# Altium PCB PCB1.PcbDoc (part 2 of 2)
Units mm, origin at the board's own origin, x right, y up, seen from the top; angles counter-clockwise.
Board outline 91 x 53 mm, 2 copper layers (Top Layer, Bottom Layer); 68 components, 95 nets, 342 pads, 353 vias.
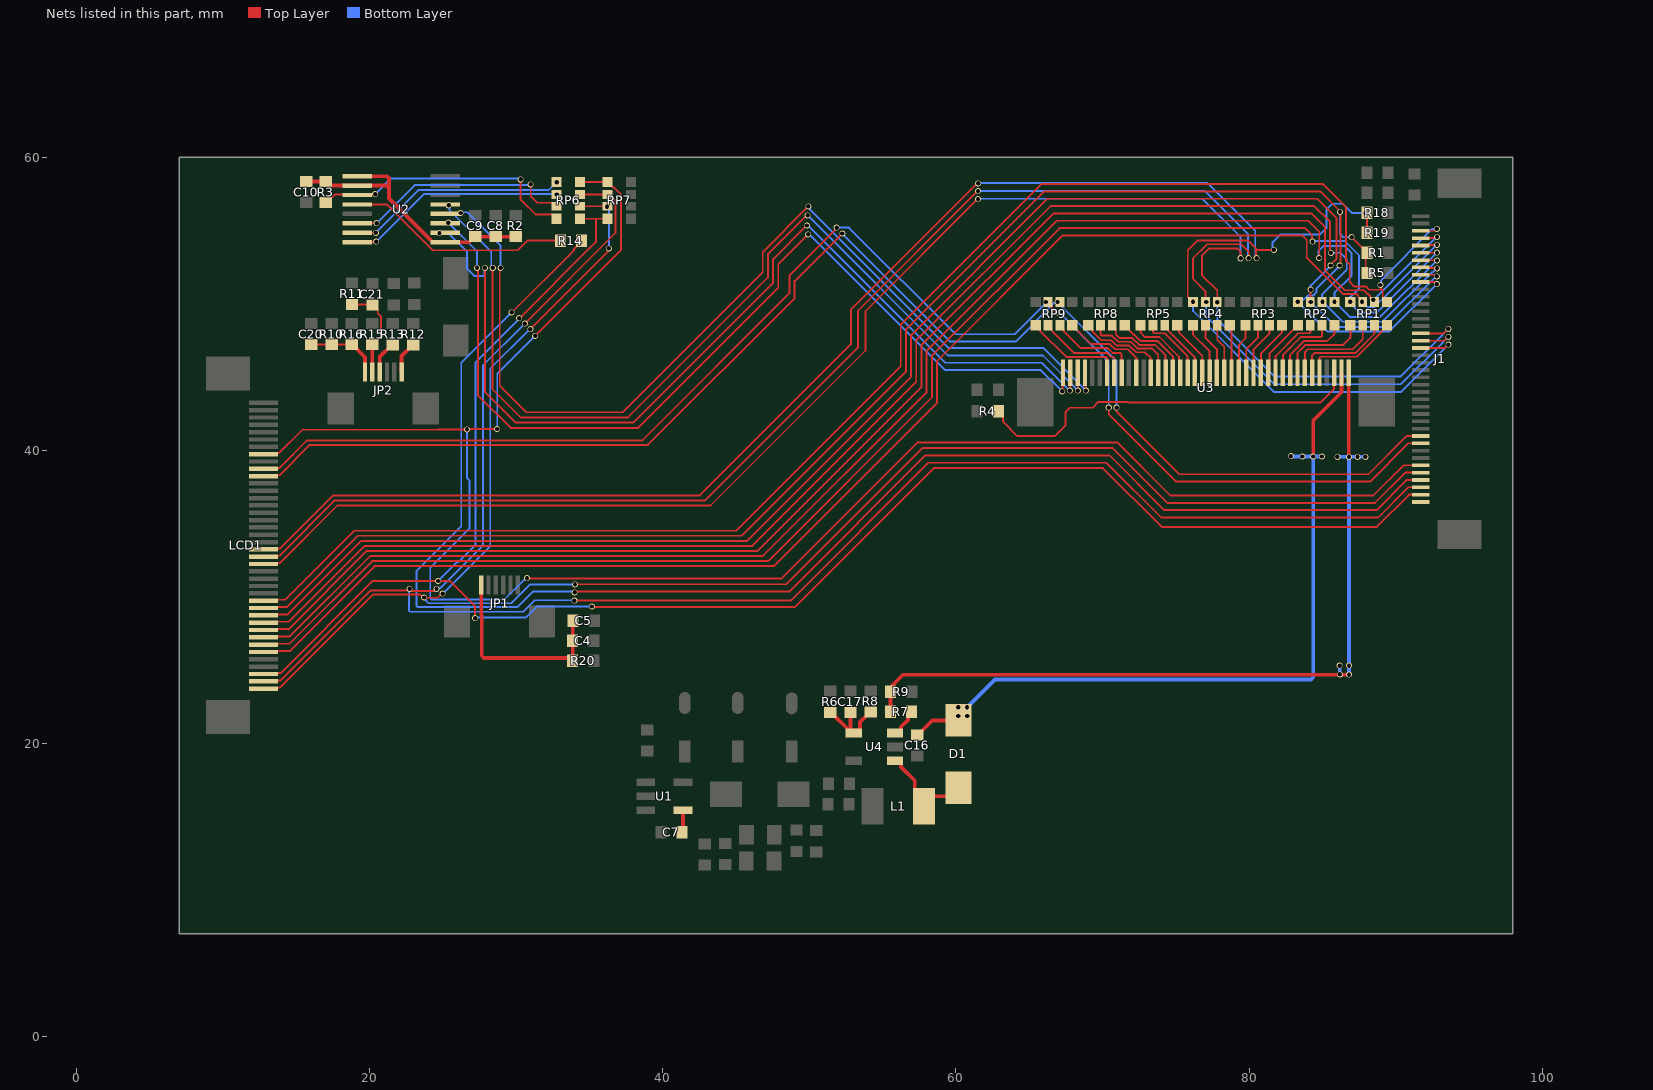
[diagram p2: the nets of this part, all layers, seen from the top]

## Via types
v1: diameter 0.41, hole 0.3, Top Layer to Bottom Layer, tented both sides, 353 vias

## Nets (pads, with @x,y where several pads share a name; then routed paths per layer and width w, separated by ;. In a path a pad name is that pad's centre, name@x,y a point inside that pad or via, vN(x,y) a via of type N, cw(c..) or ccw(c..) an arc to the next point about the centre after c; other vN are vias at no path point) (continued)
LCD_G5: J1.17 LCD1.23 RP4.2 | length 110
  Top Layer w0.127: LCD1.23@12.751,32.236 12.814,32.3 13.859,32.3 17.791,36.231 43.255,36.231 53.829,46.806 53.829,49.498 61.468,57.137 v1(61.505,57.137) ; RP4.2@77.826,50.123 77.826,50.901 76.784,51.943 76.784,53.264 77.292,53.772 79.2,53.772 79.427,53.545 v1(79.427,53.1) ; J1.17@91.719,47.975 93.271,47.975 93.577,48.281 v1(93.599,48.281)
  Bottom Layer w0.127: v1(61.505,57.137) 61.529,57.162 76.807,57.162 79.419,54.549 79.419,53.108 v1(79.427,53.1) ; v1(77.826,50.089) 77.826,48.928 81.712,45.041 90.36,45.041 93.203,47.885 93.203,47.907 93.577,48.281 v1(93.599,48.281)
LCD_G6: J1.18 LCD1.22 RP4.3 | length 112.8
  Top Layer w0.127: LCD1.22@12.751,32.736 12.815,32.8 13.852,32.8 17.628,36.576 42.892,36.576 53.329,47.013 53.329,49.535 61.468,57.674 v1(61.504,57.674) ; RP4.3@77.026,50.123 77.026,50.863 76.175,51.714 76.175,53.086 77.14,54.051 79.477,54.051 79.975,53.553 v1(79.975,53.111) ; J1.18@91.719,47.475 93.308,47.475 93.577,47.744 v1(93.599,47.744)
  Bottom Layer w0.127: v1(61.504,57.674) 61.529,57.699 76.977,57.699 79.919,54.757 79.919,53.167 v1(79.975,53.111) ; v1(77.068,50.118) 77.068,49.148 81.712,44.504 90.36,44.504 93.203,47.348 93.203,47.37 93.577,47.744 v1(93.599,47.744)
LCD_G7: J1.19 LCD1.21 R18.1 R19.1 RP4.4 | length 127.5
  Top Layer w0.127: LCD1.21@12.751,33.236 12.814,33.3 13.894,33.3 17.515,36.921 42.53,36.921 52.829,47.22 52.829,49.572 61.468,58.211 v1(61.519,58.211) ; v1(76.176,50.123) 75.819,50.48 75.819,53.645 76.479,54.305 79.934,54.305 80.478,53.761 80.478,53.145 v1(80.512,53.111) ; 80.493,53.721 80.543,53.67 v1(81.686,53.67) ; v1(87.945,56.18) 88.021,56.18 R18.1@88.036,56.195 R19.1@88.036,54.828 ; J1.19@91.719,46.975 93.367,46.975 v1(93.599,47.207)
  Bottom Layer w0.127: v1(61.519,58.211) 61.544,58.236 77.147,58.236 80.419,54.964 80.419,53.204 v1(80.512,53.111) ; v1(76.176,50.123) 76.176,49.503 81.712,43.967 90.36,43.967 v1(93.599,47.207) ; v1(81.686,53.67) 81.685,53.67 81.61,53.745 81.61,54.204 82.118,54.712 84.836,54.712 85.293,55.169 85.293,56.439 85.674,56.82 86.411,56.82 87.051,56.18 v1(87.945,56.18)
LCD_HS: J1.31 LCD1.11 RP9.2 | length 98.7
  Top Layer w0.127: LCD1.11@12.751,38.236 12.808,38.294 13.859,38.294 15.926,40.361 38.989,40.361 48.997,50.368 48.997,51.537 v1(52.248,54.788) ; v1(70.964,42.901) 70.964,42.629 75.231,38.362 88.15,38.362 90.763,40.975 J1.31@91.719,40.975
  Bottom Layer w0.127: v1(52.248,54.788) 59.623,47.412 64.069,47.412 66.717,50.06 66.875,50.06 v1(66.929,50.114) 70.964,46.079 v1(70.964,42.901)
LCD_R0: J1.3 LCD1.28 RP1.1 | length 103.8
  Top Layer w0.127: LCD1.28@12.751,29.736 12.814,29.8 14.255,29.8 18.963,34.508 45.023,34.508 56.236,45.72 56.236,48.565 65.832,58.161 85.067,58.161 86.603,56.624 86.603,52.944 86.868,52.68 86.868,51.486 87.182,51.171 87.995,51.171 88.214,50.952 89.078,50.952 ; v1@88.875,51.333 89.013,51.195 89.013,51.017 89.078,50.952 ; RP1.1@89.41,50.123 89.124,50.409 89.124,50.907 89.078,50.952 ; J1.3@91.719,54.975 92.682,54.975 v1(92.812,55.105)
  Bottom Layer w0.127: v1(88.959,51.274) 89.013,51.328 89.013,51.599 92.512,55.098 92.805,55.098 v1(92.812,55.105)
LCD_R1: J1.4 LCD1.32 RP1.2 | length 100.8
  Top Layer w0.127: LCD1.32@12.751,27.736 12.814,27.8 14.465,27.8 19.794,33.129 46.473,33.129 57.65,44.306 57.65,47.151 66.66,56.161 84.238,56.161 85.184,55.215 85.184,52.774 85.177,52.767 85.177,52.266 86.526,50.917 87.816,50.917 88.07,50.663 88.139,50.663 88.251,50.552 88.251,50.482 88.56,50.173 RP1.2@88.56,50.123 ; J1.4@91.719,54.475 92.665,54.475 92.746,54.556 v1(92.823,54.556)
  Bottom Layer w0.127: v1(88.477,50.256) 88.5,50.256 92.8,54.556 v1(92.823,54.556)
LCD_R2: J1.5 LCD1.35 RP1.3 | length 99.2
  Top Layer w0.127: LCD1.35@12.751,26.236 12.814,26.3 14.539,26.3 20.335,32.095 47.56,32.095 58.71,43.245 58.71,46.09 67.281,54.661 83.617,54.661 83.932,54.345 83.932,53.126 86.395,50.663 87.339,50.663 87.451,50.552 87.451,50.482 RP1.3@87.75,50.183 ; J1.5@91.719,53.975 91.742,53.997 92.801,53.997 v1(92.823,54.019)
  Bottom Layer w0.127: v1(87.706,50.14) 88.068,49.777 88.558,49.777 89.535,50.754 92.8,54.019 v1(92.823,54.019)
LCD_R3: J1.6 LCD1.34 RP1.4 | length 101.8
  Top Layer w0.127: LCD1.34@12.751,26.736 12.814,26.8 14.531,26.8 20.171,32.439 47.198,32.439 58.357,43.599 58.357,46.443 67.074,55.161 83.824,55.161 84.297,54.688 84.297,54.26 v1(84.328,54.229) ; J1.6@91.719,53.475 91.723,53.479 92.819,53.479 v1(92.823,53.482)
  Bottom Layer w0.127: v1(84.328,54.229) 84.379,54.28 86.512,54.28 87.503,53.289 87.503,51.054 86.893,50.444 86.893,50.063 87.012,49.944 87.012,49.919 87.528,49.403 88.721,49.403 89.075,49.757 92.8,53.482 v1(92.823,53.482)
  other v1: 86.91,50.123
LCD_R4: J1.7 LCD1.33 RP2.1 | length 104.6
  Top Layer w0.127: LCD1.33@12.751,27.236 12.814,27.3 14.549,27.3 20.033,32.784 46.835,32.784 58.003,43.952 58.003,46.797 66.867,55.661 84.031,55.661 84.789,54.903 v1(84.789,53.115) ; J1.7@91.719,52.975 91.734,52.96 92.808,52.96 v1(92.823,52.945)
  Bottom Layer w0.127: v1(84.789,53.115) 84.734,53.169 84.734,53.592 85.09,53.948 86.485,53.948 86.995,53.438 86.995,51.918 85.827,50.749 85.827,50.128 v1(85.832,50.123) 86.857,49.098 88.953,49.098 92.8,52.945 v1(92.823,52.945)
LCD_R5: J1.8 LCD1.31 RP2.2 | length 104.7
  Top Layer w0.127: LCD1.31@12.751,28.236 12.814,28.3 14.482,28.3 19.656,33.474 46.11,33.474 57.296,44.659 57.296,47.504 66.453,56.661 84.445,56.661 85.527,55.579 85.527,53.527 v1(85.58,53.475) ; J1.8@91.719,52.475 91.753,52.442 92.789,52.442 v1(92.823,52.408)
  Bottom Layer w0.127: v1(85.58,53.475) 86.225,53.475 86.665,53.035 86.665,52.324 84.988,50.648 84.988,50.241 85.014,50.216 v1(85.014,50.14) 86.385,48.768 89.103,48.768 92.459,52.123 92.504,52.123 92.789,52.408 v1(92.823,52.408)
LCD_R6: J1.9 LCD1.30 RP2.3 | length 105.6
  Top Layer w0.127: LCD1.30@12.751,28.736 12.814,28.8 14.398,28.8 19.416,33.818 45.748,33.818 56.943,45.013 56.943,47.858 66.246,57.161 84.652,57.161 85.975,55.838 85.975,53.078 85.573,52.675 v1(85.573,52.603) ; RP2.3@84.182,50.123 84.201,50.142 v1(84.201,50.952) ; J1.9@91.719,51.975 92.631,51.975 92.735,51.871 v1(92.811,51.871)
  Bottom Layer w0.127: v1(84.201,50.114) 85.903,48.412 89.306,48.412 92.765,51.871 v1(92.811,51.871) ; v1(84.201,50.952) 84.201,51.232 v1(85.573,52.603)
LCD_R7: J1.10 LCD1.29 R1.1 R5.1 RP2.4 | length 113.3
  Top Layer w0.127: LCD1.29@12.751,29.236 12.814,29.3 14.339,29.3 19.202,34.163 45.386,34.163 56.589,45.366 56.589,48.211 66.039,57.661 84.859,57.661 v1@86.229,56.291 ; v1(86.182,52.603) 86.229,52.65 v1@86.229,56.261 ; v1(86.999,54.534) 87.015,54.534 88.036,53.512 R1.1@88.036,53.462 ; R1.1@87.96,53.462 87.96,52.172 R5.1@88.036,52.095 ; J1.10@91.719,51.475 92.682,51.475 92.812,51.345 v1(92.812,51.334)
  Bottom Layer w0.127: v1(86.182,52.603) 84.597,51.018 84.597,50.789 84.365,50.557 84.009,50.557 83.606,50.154 83.363,50.154 v1(83.332,50.123) 85.347,48.108 89.574,48.108 92.801,51.334 v1(92.812,51.334) ; v1(86.208,56.261) 86.208,54.762 86.436,54.534 v1(86.999,54.534)
LCD_VS: J1.32 LCD1.10 RP9.3 | length 98.9
  Top Layer w0.127: LCD1.10@12.751,38.736 12.812,38.798 13.855,38.798 15.723,40.665 38.608,40.665 48.643,50.7 48.643,51.92 51.867,55.143 v1(51.867,55.194) ; v1(66.142,50.114) RP9.3@66.231,50.114 ; RP9.3@66.25,50.114 RP9.3@66.231,50.114 ; v1(66.98,49.403) 66.926,49.457 66.728,49.457 66.585,49.6 66.583,49.6 66.509,49.675 66.509,49.836 RP9.3@66.231,50.114 ; v1(70.427,42.901) 70.427,42.459 75.024,37.862 88.256,37.862 90.869,40.475 J1.32@91.719,40.475
  Bottom Layer w0.127: v1(51.867,55.194) 52.7,55.194 59.982,47.912 64.012,47.912 66.142,50.042 v1(66.142,50.114) ; v1(66.98,49.403) 67.048,49.403 68.293,48.158 70.427,46.024 v1(70.427,42.901)
LED+: C16.2 D1.2 U3.2 | length 52.3
  Top Layer w0.254: C16.2@57.328,20.574 57.389,20.574 58.38,21.565 D1.2@59.944,21.565 ; D1.2@60.173,21.579 60.757,22.163 v1(60.757,22.454) ; v1(84.379,39.573) 84.379,42.037 86.305,43.963 U3.2@86.305,45.259
  Bottom Layer w0.254: v1(60.757,22.454) 62.662,24.359 84.23,24.359 84.379,24.507 v1(84.379,39.573) ; v1(82.853,39.6) 82.88,39.573 v1(83.642,39.573) v1(84.379,39.573) ; v1(84.963,39.573) v1(84.379,39.573)
  other v1: 60.147,21.869 60.782,21.869 60.147,22.479
LED-: R7.1 R9.1 U3.1 | length 56
  Top Layer w0.254: R7.1@55.522,22.174 55.535,22.187 55.535,23.429 R9.1@55.601,23.495 ; R9.1@55.601,23.901 56.388,24.689 v1@86.233,24.689 ; v1(86.19,24.717) 86.205,24.717 v1@86.233,24.689 ; U3.1@86.805,45.282 86.811,45.275 86.811,39.554 v1(86.817,39.548) ; v1(86.817,24.689) v1@86.233,24.689
  Bottom Layer w0.254: v1(86.03,39.548) v1(86.817,39.548) ; v1(86.182,25.298) 86.19,25.29 v1(86.19,24.717) ; v1(86.817,24.689) v1(86.817,25.298) v1(86.817,39.548) ; v1(87.935,39.548) v1(87.401,39.548) v1(86.817,39.548)
NetC4_2: C4.2 C5.2 JP1.6 R20.2 | length 14
  Top Layer w0.254: JP1.6@27.609,30.818 27.609,28.781 27.65,28.74 27.65,25.981 27.799,25.832 33.641,25.832 R20.2@33.844,25.629 33.863,25.647 33.863,27 33.863,28.353 C5.2@33.881,28.372
NetC7_2: C7.2 U1.4 | length 1.5
  Top Layer w0.127: C7.2@41.351,13.919 C7.2@41.377,13.945
  Top Layer w0.254: C7.2@41.377,13.945 U1.4@41.377,15.443
NetC8_2: C8.2 C9.2 C10.2 R2.1 R3.1 U2.1 U2.9 U2.10 | length 19.5
  Top Layer w0.254: C10.2@15.662,58.34 15.664,58.338 R3.1@17.008,58.338 17.289,58.057 U2.10@19.162,58.057 21.129,58.057 21.326,57.86 ; U2.9@19.162,58.7 21.177,58.7 21.326,58.551 21.326,57.86 ; R2.1@29.962,54.577 C9.2@27.219,54.577 27.169,54.577 26.791,54.199 U2.1@25.162,54.199 24.312,54.199 24.103,54.407 24.087,54.407 21.326,57.168 21.326,57.86
NetC17_2: C17.2 R6.1 R8.1 U4.4 | length 5.4
  Top Layer w0.254: R6.1@51.435,22.11 51.485,22.11 52.69,20.904 U4.4@52.807,20.904 ; C17.2@52.807,22.11 U4.4@52.807,20.904 ; U4.4@52.883,20.879 53.45,20.879 53.455,20.884 53.455,21.451 53.88,21.876 53.88,21.887 54.128,22.135 R8.1@54.178,22.135 ; U4.4@52.959,20.904 U4.4@52.807,20.904
NetC20_2: C20.2 JP2.6 R10.1 R16.2 | length 5
  Top Layer w0.127: C20.2@16.002,47.205 18.768,47.205 R16.2@18.771,47.207
  Top Layer w0.254: R16.2@18.771,47.207 18.821,47.207 19.68,46.348 JP2.6@19.68,45.347
NetC21_2: C21.2 JP2.5 R11.1 R15.2 | length 6.5
  Top Layer w0.127: R11.1@18.796,49.948 20.168,49.948 C21.2@20.193,49.923 20.243,49.923 20.555,49.611 20.555,49.34 20.783,49.111 20.783,47.772 20.218,47.207 R15.2@20.168,47.207
  Top Layer w0.254: R15.2@20.168,47.207 20.18,47.195 JP2.5@20.18,45.347
NetD1_1: D1.1 L1.2 U4.1 | length 7.1
  Top Layer w0.254: U4.1@55.832,18.811 56.082,18.811 56.255,18.638 56.255,18.388 57.185,17.459 57.185,16.145 L1.2@57.607,15.723 ; L1.2@57.808,15.723 57.808,15.774 58.431,16.397 59.425,16.397 D1.1@60.274,17.247
NetJP2_1: JP2.1 R12.2 | length 2.2
  Top Layer w0.254: JP2.1@22.18,45.347 22.18,46.436 22.937,47.193 R12.2@22.987,47.193
NetJP2_4: JP2.4 R13.2 | length 2.2
  Top Layer w0.254: JP2.4@20.68,45.347 20.68,46.358 21.515,47.193 R13.2@21.565,47.193
NetR4_1: R4.1 U3.3 | length 26.8
  Top Layer w0.127: R4.1@62.904,42.672 63.216,42.36 63.216,41.942 64.188,40.97 66.751,40.97 67.488,41.707 67.488,42.621 67.767,42.901 69.331,42.901 69.726,43.296 71.735,43.296 71.764,43.267 84.876,43.267 85.805,44.196 U3.3@85.805,45.282
NetR7_2: R7.2 U4.3 | length 2
  Top Layer w0.254: U4.3@55.832,20.711 56.082,20.711 56.255,20.884 56.255,21.134 56.724,21.603 56.724,22.104 R7.2@56.794,22.174
NetRP1_5: RP1.5 U3.8 | length 6.3
  Top Layer w0.127: U3.8@83.305,45.282 83.305,46.653 83.693,47.041 83.845,47.193 86.436,47.193 86.91,47.667 RP1.5@86.91,48.523
NetRP1_6: RP1.6 U3.7 | length 6.7
  Top Layer w0.127: U3.7@83.805,45.282 83.805,46.687 84.006,46.888 87.071,46.888 87.76,47.577 RP1.6@87.76,48.523
NetRP1_7: RP1.7 U3.6 | length 6.6
  Top Layer w0.127: U3.6@84.305,45.282 84.305,46.484 84.455,46.634 87.232,46.634 88.56,47.962 RP1.7@88.56,48.523
NetRP1_8: RP1.8 U3.5 | length 6.6
  Top Layer w0.127: U3.5@84.805,45.282 84.805,46.306 84.879,46.38 87.337,46.38 89.051,48.094 89.051,48.163 RP1.8@89.41,48.523
NetRP2_5: RP2.5 U3.12 | length 4.1
  Top Layer w0.127: U3.12@81.305,45.282 81.392,45.368 81.392,46.6 81.466,46.674 81.483,46.674 RP2.5@83.332,48.523
NetRP2_6: RP2.6 U3.11 | length 4.7
  Top Layer w0.127: U3.11@81.805,45.282 81.805,46.423 83.364,47.982 84.108,47.982 84.182,48.057 RP2.6@84.182,48.523
NetRP2_7: RP2.7 U3.10 | length 5.1
  Top Layer w0.127: U3.10@82.305,45.282 82.305,46.491 83.542,47.728 84.908,47.728 84.982,47.803 RP2.7@84.982,48.523
NetRP2_8: RP2.8 U3.9 | length 5.4
  Top Layer w0.127: U3.9@82.805,45.282 82.805,46.517 83.582,47.295 83.588,47.295 83.74,47.447 85.319,47.447 85.832,47.961 RP2.8@85.832,48.523
NetRP3_5: RP3.5 U3.16 | length 3.4
  Top Layer w0.127: U3.16@79.305,45.282 79.305,47.176 79.754,47.625 RP3.5@79.754,48.523
NetRP3_6: RP3.6 U3.15 | length 3.6
  Top Layer w0.127: U3.15@79.805,45.282 79.805,46.887 80.604,47.686 RP3.6@80.604,48.523
NetRP3_7: RP3.7 U3.14 | length 3.7
  Top Layer w0.127: U3.14@80.305,45.282 80.305,46.882 81.404,47.981 RP3.7@81.404,48.523
NetRP3_8: RP3.8 U3.13 | length 3.8
  Top Layer w0.127: U3.13@80.805,45.282 80.805,46.596 82.254,48.045 RP3.8@82.254,48.523
NetRP4_5: RP4.5 U3.20 | length 3.7
  Top Layer w0.127: RP4.5@76.176,48.523 76.176,47.885 77.305,46.756 U3.20@77.305,45.282
NetRP4_6: RP4.6 U3.19 | length 3.6
  Top Layer w0.127: RP4.6@77.026,48.523 77.026,47.685 77.805,46.906 U3.19@77.805,45.282
NetRP4_7: RP4.7 U3.18 | length 3.4
  Top Layer w0.127: RP4.7@77.826,48.523 77.826,47.535 78.305,47.056 U3.18@78.305,45.282
NetRP4_8: RP4.8 U3.17 | length 3.3
  Top Layer w0.127: RP4.8@78.676,48.523 78.805,48.394 U3.17@78.805,45.282
NetRP5_5: RP5.5 U3.24 | length 4.9
  Top Layer w0.127: RP5.5@72.598,48.523 72.598,48.027 72.898,47.727 73.889,47.727 75.219,46.397 75.219,45.368 U3.24@75.305,45.282
NetRP5_6: RP5.6 U3.23 | length 4.6
  Top Layer w0.127: RP5.6@73.448,48.523 73.448,48.055 73.522,47.981 74.244,47.981 75.805,46.42 U3.23@75.805,45.282
NetRP5_7: RP5.7 U3.22 | length 4.1
  Top Layer w0.127: RP5.7@74.248,48.523 74.484,48.286 74.484,48.167 76.305,46.346 U3.22@76.305,45.282
NetRP5_8: RP5.8 U3.21 | length 3.9
  Top Layer w0.127: RP5.8@75.098,48.523 75.21,48.411 75.21,48.057 76.805,46.461 U3.21@76.805,45.282
NetRP8_5: RP8.5 U3.28 | length 6.3
  Top Layer w0.127: RP8.5@69.02,48.523 69.306,48.236 69.306,48.107 69.911,47.502 70.612,47.502 70.969,47.145 71.83,47.145 72.289,46.685 72.898,46.685 73.286,46.298 73.286,45.301 U3.28@73.305,45.282
NetRP8_6: RP8.6 U3.27 | length 6.4
  Top Layer w0.127: RP8.6@69.87,48.523 69.87,47.903 69.944,47.828 70.645,47.828 71.074,47.399 71.935,47.399 72.395,46.939 73.381,46.939 73.805,46.515 U3.27@73.805,45.282
NetRP8_7: RP8.7 U3.26 | length 5.9
  Top Layer w0.127: RP8.7@70.67,48.523 70.906,48.286 70.906,47.926 71.18,47.653 72.04,47.653 72.5,47.193 73.584,47.193 74.305,46.472 U3.26@74.305,45.282
NetRP8_8: RP8.8 U3.25 | length 5.3
  Top Layer w0.127: RP8.8@71.52,48.523 72.146,47.896 72.156,47.896 72.605,47.447 73.762,47.447 74.805,46.404 U3.25@74.805,45.282
NetRP9_5: RP9.5 U3.34 | length 6.8
  Top Layer w0.127: RP9.5@65.442,48.523 65.728,48.236 65.728,48.167 67.523,46.372 70.231,46.372 70.305,46.298 U3.34@70.305,45.282
NetRP9_6: RP9.6 U3.33 | length 6.5
  Top Layer w0.127: RP9.6@66.292,48.523 66.528,48.286 66.528,48.167 68.069,46.626 70.336,46.626 70.579,46.383 70.731,46.383 70.805,46.308 U3.33@70.805,45.282
NetRP9_7: RP9.7 U3.32 | length 6.4
  Top Layer w0.127: RP9.7@67.092,48.523 67.328,48.286 67.328,48.167 68.53,46.965 70.357,46.965 70.684,46.637 71.22,46.637 71.305,46.552 U3.32@71.305,45.282
NetRP9_8: RP9.8 U3.30 | length 5.6
  Top Layer w0.127: RP9.8@67.942,48.523 69.216,47.248 70.506,47.248 70.864,46.891 71.725,46.891 72.314,46.302 U3.30@72.314,45.949
RESET: J1.40
RT_CLK: RP6.2 U2.16 | length 15
  Top Layer w0.127: U2.16@19.162,54.199 19.176,54.214 20.432,54.214 v1(20.447,54.229)
  Bottom Layer w0.127: v1(20.447,54.229) 23.711,57.493 32.709,57.493 v1(32.753,57.448)
RT_CS: RP6.1 U2.15 | length 15
  Top Layer w0.127: U2.15@19.162,54.842 19.163,54.84 20.42,54.84 v1(20.422,54.839)
  Bottom Layer w0.127: v1(20.422,54.839) 23.33,57.747 32.202,57.747 v1(32.753,58.298)
RT_MISO: R14.2 U2.12 | length 15.4
  Top Layer w0.127: U2.12@19.162,56.771 21.17,56.771 24.296,53.645 30.1,53.645 30.76,54.305 R14.2@33.006,54.305
RT_MOSI: RP6.3 U2.14 | length 15.8
  Top Layer w0.127: U2.14@19.162,55.485 19.168,55.492 20.465,55.492 v1(20.472,55.499) ; v1(30.988,58.142) 30.988,57.328 31.431,56.885 32.517,56.885 RP6.3@32.753,56.648
  Bottom Layer w0.127: v1(20.472,55.499) 23.062,58.088 30.934,58.088 v1(30.988,58.142)
RT_PEN: R3.2 RP6.4 U2.11 | length 18.4
  Top Layer w0.127: R3.2@17.008,56.888 17.058,56.888 17.618,57.448 19.128,57.448 U2.11@19.162,57.414 19.195,57.447 20.338,57.447 v1(20.371,57.48) ; v1(30.302,58.484) 30.302,57.099 31.316,56.085 32.467,56.085 RP6.4@32.753,55.798
  Bottom Layer w0.127: v1(20.371,57.48) 21.438,58.547 30.075,58.547 30.084,58.538 30.248,58.538 v1(30.302,58.484)
TOUCH_INT: J1.39 LCD1.38 RP6.5 RP7.4 | length 121
  Top Layer w0.127: LCD1.38@12.751,24.736 12.814,24.8 13.928,24.8 20.21,31.081 v1(24.67,31.081) ; v1@24.79,31.039 24.79,31.071 24.8,31.081 25.468,31.081 27.191,29.358 v1(27.191,28.548) ; v1(30.204,49.019) 30.239,49.019 35.022,53.801 35.452,54.232 35.452,55.798 ; RP6.5@34.353,55.798 35.452,55.798 ; v1(35.154,29.337) 35.179,29.312 49.022,29.312 58.496,38.786 70.028,38.786 74.041,34.773 88.722,34.773 90.925,36.975 J1.39@91.719,36.975 ; RP7.4@36.233,55.798 35.452,55.798
  Bottom Layer w0.127: v1(24.67,31.081) 25.954,32.365 26.037,32.365 27.229,33.557 27.229,45.991 30.205,48.967 v1@30.205,49.018 ; v1(27.191,28.548) 27.231,28.588 30.645,28.588 31.394,29.337 v1(35.154,29.337)
TOUCH_MISO: J1.37 R14.1 | length 104.9
  Top Layer w0.127: v1(29.693,49.403) 29.712,49.403 33.953,53.643 33.953,53.752 34.456,54.255 R14.1@34.456,54.305 ; v1(33.983,30.31) 34.026,30.353 48.62,30.353 57.918,39.652 70.478,39.652 74.216,35.913 88.699,35.913 90.761,37.975 J1.37@91.719,37.975
  Bottom Layer w0.127: v1(29.693,49.403) 26.249,45.959 26.249,34.809 23.19,31.75 23.19,29.384 23.265,29.31 30.1,29.31 31.143,30.353 33.94,30.353 v1(33.983,30.31)
TOUCH_RST: J1.35 LCD1.8 RP6.8 RP7.1 | length 126.5
  Top Layer w0.127: LCD1.8@12.751,39.736 12.833,39.818 13.834,39.818 15.418,41.402 24.651,41.402 24.677,41.427 v1(26.645,41.427) 26.657,41.44 28.689,41.44 v1(28.702,41.453) ; v1(30.734,31.278) 30.77,31.242 48.094,31.242 57.391,40.538 71.005,40.538 74.631,36.913 88.488,36.913 90.55,38.975 J1.35@91.719,38.975 ; v1(31.293,47.803) 37.16,53.67 37.16,57.441 36.662,57.939 36.593,57.939 RP7.1@36.233,58.298 RP6.8@34.353,58.298
  Bottom Layer w0.127: v1(26.645,41.427) 26.645,38.1 26.822,37.922 26.822,34.671 24.13,31.979 24.13,29.892 24.204,29.818 29.194,29.818 30.541,31.166 30.545,31.166 30.657,31.278 v1(30.734,31.278) ; v1(28.702,41.453) 28.702,45.212 v1(31.293,47.803)
TOUCH_SCL: J1.38 LCD1.39 RP6.7 RP7.2 | length 126
  Top Layer w0.127: LCD1.39@12.751,24.236 12.814,24.3 13.936,24.3 20.074,30.437 22.548,30.437 22.602,30.491 22.66,30.491 22.733,30.418 v1(22.733,30.545) ; v1@22.778,30.409 24.419,30.409 24.56,30.55 v1(24.563,30.55) ; v1(30.584,48.639) 36.774,54.829 36.774,57.027 36.662,57.139 36.593,57.139 36.283,57.448 RP7.2@36.233,57.448 RP6.7@34.353,57.448 ; v1(33.96,29.743) 48.717,29.743 58.125,39.152 70.271,39.152 74.009,35.413 88.804,35.413 90.866,37.475 J1.38@91.719,37.475
  Bottom Layer w0.127: v1(22.733,30.545) 22.682,30.495 22.682,29.056 22.757,28.981 30.479,28.981 31.259,29.762 33.942,29.762 v1(33.96,29.743) ; v1(24.563,30.55) 24.613,30.6 24.831,30.6 27.729,33.498 27.729,45.784 v1(30.584,48.639)
TOUCH_SDA: J1.36 LCD1.40 RP6.6 RP7.3 | length 123.1
  Top Layer w0.127: LCD1.40@12.751,23.736 12.814,23.8 13.868,23.8 20.218,30.15 23.457,30.15 23.652,29.955 v1(23.724,29.955) 23.742,29.936 24.628,29.936 24.905,30.213 v1(24.981,30.213) ; v1(30.963,48.259) 36.268,53.564 36.268,53.718 v1(36.322,53.772) ; v1(34.011,30.846) 34.025,30.861 48.421,30.861 57.711,40.152 70.685,40.152 74.424,36.413 88.593,36.413 90.655,38.475 J1.36@91.719,38.475 ; RP6.6@34.353,56.648 RP7.3@36.195,56.648
  Bottom Layer w0.127: v1(23.724,29.955) 23.724,29.878 23.876,29.726 23.876,29.713 24.025,29.564 29.647,29.564 30.919,30.836 34,30.836 v1(34.011,30.846) ; v1(24.981,30.213) 28.229,33.461 28.229,45.577 30.912,48.26 v1(30.963,48.259) ; v1(36.195,56.617) 36.322,56.49 v1(36.322,53.772)
X+: U2.2 U3.39 | length 67.1
  Top Layer w0.127: v1(27.861,52.451) 27.88,52.433 27.88,43.973 29.97,41.883 37.975,41.883 47.526,51.433 47.526,53.038 v1(49.827,55.338) ; v1(67.778,44.071) 67.791,44.085 67.791,45.268 U3.39@67.805,45.282
  Bottom Layer w0.127: v1(24.765,54.813) 25.375,54.813 26.645,53.543 26.645,52.375 27.127,51.892 27.764,51.892 27.838,51.967 27.838,52.428 v1(27.861,52.451) ; v1(49.827,55.338) 49.886,55.338 59.258,45.966 65.861,45.966 67.756,44.071 v1(67.778,44.071)
X-: U2.4 U3.37 | length 67.1
  Top Layer w0.127: v1(28.935,52.451) 28.88,52.396 28.88,44.387 30.677,42.59 37.268,42.59 46.819,52.141 46.819,53.524 v1(49.936,56.642) ; U3.37@68.805,45.282 68.833,45.254 68.833,44.099 v1(68.861,44.071)
  Bottom Layer w0.127: v1(26.213,56.185) 26.264,56.236 26.645,56.236 28.935,53.945 v1(28.935,52.451) ; v1(49.936,56.642) 49.936,56.565 50.038,56.464 50.038,56.438 59.51,46.966 65.988,46.966 68.861,44.093 v1(68.861,44.071)
Y+: U2.3 U3.40 | length 65.5
  Top Layer w0.127: v1(27.324,52.451) 27.38,52.396 27.38,43.766 29.616,41.529 38.329,41.529 47.879,51.08 47.879,52.705 v1(49.911,54.737) ; v1(67.241,44.018) 67.273,44.05 67.273,45.25 U3.40@67.305,45.282
  Bottom Layer w0.127: v1(25.375,55.524) 27.324,53.575 v1(27.324,52.451) ; v1(49.911,54.737) 49.987,54.737 59.258,45.466 65.802,45.466 67.241,44.027 v1(67.241,44.018)
Y-: U2.5 U3.38 | length 67.4
  Top Layer w0.127: v1(28.398,52.451) 28.38,52.433 28.38,44.18 30.324,42.236 37.621,42.236 47.172,51.787 47.172,53.37 49.834,56.032 v1(49.885,56.032) ; U3.38@68.305,45.282 68.314,45.272 68.314,44.08 v1(68.324,44.071)
  Bottom Layer w0.127: v1(25.392,56.716) 25.446,56.662 25.446,56.393 28.296,53.543 28.296,52.63 28.398,52.528 v1(28.398,52.451) ; v1(49.885,56.032) 59.451,46.466 65.942,46.466 68.324,44.084 v1(68.324,44.071)
pads on no net: LCD1.0 U2.13 U3.35

## Polygon pours and split planes (outlines as drawn)
GND on Top Layer "GND_L01_P027" (solid, remove dead copper, pour order 27): 7.01,59.995 97.993,59.995 97.993,7.01 97.968,6.985 6.985,6.985
+3.3_EXT on Top Layer "+3.3_EXT_L01_P019" (solid, remove dead copper, pour order 19): 18.491,27.305 18.466,27.28 17.424,27.28 16.916,26.772 16.916,22.987 32.995,22.987 33.02,22.962 33.02,7.01 46.457,7.01 46.482,6.985 46.507,7.01 46.507,12.573 38.481,12.573 37.77,13.284 37.77,24.562 37.109,25.222 24.003,25.222 23.216,26.01 18.491,26.01
LED- on Top Layer "LED-_L01_P026" (solid, remove dead copper, pour order 26): 85.776,38.938 87.782,38.938 88.341,39.497 88.341,40.843 88.265,40.843 87.452,41.656 87.452,46.025 87.274,46.203 86.665,46.203 86.665,43.637 85.75,42.723
LED+ on Top Layer "LED+_L01_P025" (solid, remove dead copper, pour order 25): 86.157,46.177 86.157,44.272 82.067,40.183 82.067,39.141 82.22,38.989 85.496,38.989 85.674,39.167 85.674,42.723 86.487,43.536 86.462,43.561 86.462,46.177
LED- on Top Layer "LED-_L01_P023" (solid, remove dead copper, pour order 23): 55.042,25.959 56.794,27.711 87.401,27.711 87.833,27.28 87.833,23.647 55.169,23.647 55.042,23.774
+5 on Top Layer "+5_L01_P020" (solid, remove dead copper, pour order 20): 92.1,55.347 93.878,55.347 94.005,55.474 94.005,56.337 93.955,56.388 92.126,56.388 92.075,56.337
+3.3_EXT on Top Layer "+3.3_EXT_L01_P016" (solid, remove dead copper, pour order 16): 11.709,40.894 11.557,41.046 10.744,41.046 10.668,40.97 10.668,40.107 10.77,40.005 11.709,40.005 11.811,40.107 11.811,40.894
+5 on Top Layer "+5_L01_P015" (solid, remove dead copper, pour order 15): 11.76,43.383 11.709,43.434 10.617,43.434 10.617,42.52 10.668,42.469 11.633,42.469 11.836,42.672 11.836,43.383
LED- on Top Layer "LED-_L01_P013" (solid, remove dead copper, pour order 13): 55.067,24.028 55.042,24.003 55.042,21.692 55.88,21.692 55.931,21.641 56.032,21.742 56.032,24.054
NetR7_2 on Top Layer "NETR7_2_L01_P012" (solid, remove dead copper, pour order 12): 56.591,22.581 56.591,22.301 55.27,20.98 55.27,20.447 56.337,20.447 56.363,20.422 57.353,21.412 57.353,22.581 57.328,22.606
NetC17_2 on Top Layer "NETC17_2_L01_P011" (solid, remove dead copper, pour order 11): 50.927,22.581 50.952,22.606 54.686,22.606 54.686,21.742 53.569,20.625 53.569,20.447 52.502,20.447 51.232,21.717 51.003,21.717
GND on Top Layer "GND_L01_P010" (solid, remove dead copper, pour order 10): 48.666,13.614 48.717,13.665 51.054,13.665 51.791,14.402 51.791,16.307 50.927,16.307 50.8,16.18 50.851,16.129 50.851,15.367 49.555,15.367 48.641,14.453
L3.3V on Top Layer "L3.3V_L01_P009" (solid, remove dead copper, pour order 9): 47.015,14.529 46.99,14.503 46.99,11.278 48.108,11.278 48.133,11.303 50.749,11.303 51.029,11.582 51.029,13.005 50.775,13.259 48.616,13.259 48.184,13.691 48.184,14.503
+3.3_EXT on Top Layer "+3.3_EXT_L01_P008" (solid, remove dead copper, pour order 8): 42.342,11.227 42.367,11.252 46.253,11.252 46.253,12.624 46.228,12.649 46.203,12.624 42.748,12.624 42.342,12.217
+3.3_board on Top Layer "+3.3_BOARD_L01_P007" (solid, remove dead copper, pour order 7): 40.665,17.704 40.64,17.678 40.64,16.916 43.739,13.818 44.755,13.818 44.755,13.564 45.212,13.106 46.253,13.106 46.253,14.427 46.228,14.453 46.203,14.427 45.212,14.427 45.212,14.503 42.037,17.678
+5 on Top Layer "+5_L01_P006" (solid, remove dead copper, pour order 6): 38.43,19.914 38.125,19.609 38.125,17.069 39.421,17.069 41.021,18.669 41.046,18.644 41.986,18.644 41.986,20.244 41.961,20.269 38.405,20.269
GND on Top Layer "GND_L01_P004" (solid, remove dead copper, pour order 4): 55.169,19.38 55.194,19.406 56.439,19.406 56.439,19.177 56.921,18.694 57.861,18.694 57.861,19.482 57.201,20.142 55.169,20.142
NetD1_1 on Top Layer "NETD1_1_L01_P002" (solid, remove dead copper, pour order 2): 55.194,19.152 55.194,16.84 56.21,15.824 60.935,15.824 60.935,18.11 60.376,18.669 56.718,18.669 56.718,18.847 56.388,19.177
+5 on Top Layer "+5_L01_P000" (solid, remove dead copper, pour order 0): 40.996,18.644 41.021,18.669 45.542,18.669 45.542,18.618 46.99,17.17 46.99,15.646 47.168,15.469 50.419,15.469 50.546,15.596 50.546,17.932 50.724,18.11 52.045,18.11 52.197,17.958 52.197,15.291 52.502,14.986 55.22,14.986 55.372,15.138 55.347,15.164 55.347,18.237 53.315,20.269 41.072,20.269 40.996,20.193
LED+ on Top Layer "LED+_L01_P003" (solid, remove dead copper, pour order 3): 56.921,20.193 56.921,21.006 57.252,21.006 59.03,22.784 60.909,22.784 60.909,20.422 60.935,20.396 58.877,20.396 58.674,20.193
GND on Top Layer "GND_L01_P001" (solid, remove dead copper, pour order 1): 50.825,17.78 50.851,17.755 50.851,15.367 51.689,15.367 51.714,15.342 51.765,15.392 51.765,17.805
GND on Bottom Layer "GND_L02_P028" (solid, remove dead copper, pour order 28): 7.01,59.995 97.993,59.995 97.993,7.01 97.968,6.985 6.985,6.985
+5 on Bottom Layer "+5_L02_P021" (solid, remove dead copper, pour order 21): 92.888,56.388 97.993,56.388 97.993,7.01 97.968,7.036 32.995,7.036 32.995,20.422 33.172,20.599 40.005,20.599 40.005,12.548 41.605,10.947 88.824,10.947 89.967,12.09 89.967,37.338 94.183,41.554 94.183,54.127 92.913,55.397
LED- on Bottom Layer "LED-_L02_P024" (solid, remove dead copper, pour order 24): 85.623,23.647 89.941,23.647 89.941,39.853 89.865,39.929 85.623,39.929
LED+ on Bottom Layer "LED+_L02_P022" (solid, remove dead copper, pour order 22): 59.665,21.514 63.627,21.514 64.135,22.022 64.135,23.622 85.623,23.622 85.623,39.929 82.601,39.929 82.067,39.395 82.067,28.372 80.391,26.695 60.173,26.695 59.588,26.111
+3.3_EXT on Bottom Layer "+3.3_EXT_L02_P018" (solid, remove dead copper, pour order 18): 10.744,41.046 10.668,40.97 10.668,28.067 12.776,25.959 18.517,25.959 18.517,27.965 18.491,27.991 13.691,27.991 12.624,29.058 12.624,41.046
+5 on Bottom Layer "+5_L02_P017" (solid, remove dead copper, pour order 17): 11.709,43.434 7.493,43.434 7.01,42.951 7.01,22.987 27.559,22.987 33.02,17.526 39.98,17.526 39.98,22.772 39.987,22.78 36.783,25.984 12.802,25.984 10.643,28.143 10.643,41.529 11.709,42.596

## Other copper
Top Layer:
  pour cut-out: 86.385,54.508 86.385,51.816 87.097,51.105 88.798,51.105 88.798,51.283 89.052,51.537 89.052,53.721
  pour cut-out: 73.381,44.526 73.431,44.475 73.431,43.739 84.531,43.739 84.938,44.145 84.912,44.171 84.912,44.526
  pour cut-out: 27.254,53.67 27.254,52.324 27.711,51.867 27.711,49.225 30.302,49.225 30.353,49.174 33.503,52.324 33.503,54.458 33.274,54.686 32.918,54.331 30.658,54.331 29.997,53.67
  pour cut-out: 65.075,49.809 65.126,49.759 65.126,48.59 89.662,48.59 89.789,48.717 89.764,48.743 89.764,49.987
  pour cut-out: 87.808,59.995 86.385,58.522 57.404,58.522 56.439,59.487 56.439,59.995
Bottom Layer:
  pour cut-out: 68.351,49.098 70.866,46.584 71.628,46.584 72.161,47.117 68.885,50.394 68.174,50.394
  pour cut-out: 61.443,54.966 61.417,54.966 61.062,54.61 62.459,53.213 75.184,53.213 76.962,54.991
  pour cut-out: 18.771,48.641 18.809,48.679 23.529,48.679 27.483,44.726 27.483,39.853 27.991,39.853 29.007,38.837 33.02,42.85 33.02,49.555 30.963,51.613 31.674,52.324 31.674,53.467 34.442,56.236 32.944,57.734 23.47,57.734 20.32,54.585 20.32,52.832 18.847,51.359

## Silkscreen, mask and mechanical layers (free items; w line width, h text height)
Top Overlay:
  drawing of 112 lines, arcs and shapes, not listed
  text "VCC" at 84.912,58.496 h0.64
  text "IM2" at 82.067,57.988 h0.76
  text "ALIENTEK LCD CONFIG" at 64.973,57.328 h0.76
  text "GND" at 84.887,57.302 h0.64
  text "IM0" at 72.111,55.982 h0.76
  text "IM1" at 75.146,55.982 h0.76
  text "IM2" at 77.927,55.982 h0.76
  text "VCC" at 84.887,55.855 h0.64
  text "IM1" at 82.271,55.474 h0.76
  text "0" at 72.695,54.661 h0.76
  text "0" at 75.654,54.661 h0.76
  text "0" at 78.613,54.661 h0.76
  text "GND" at 84.861,54.661 h0.64
  text "4.3 480*272" at 63.424,54.635 h0.76
  text "4.3 800*480" at 63.475,53.467 h0.76
  text "0" at 72.695,53.365 h0.76
  text "0" at 75.654,53.365 h0.76
  text "1" at 78.765,53.365 h0.76
  text "VCC" at 84.912,53.137 h0.64
  text "IM0" at 82.144,52.807 h0.76
  text "GND" at 84.887,51.943 h0.64
  text "4.3 RGB LCD" at 44.12,48.463 h1.52
  text "for FANKE" at 25.171,42.443 h0.76
  text "for FANKE" at 14.427,37.77 h0.76 r270
  text "for ALIENTEK" at 25.179,32.366 h0.76
  text "for ALIENTEK" at 92.1,26.543 h0.76 r90
Mechanical 1:
  circle w0.254: c95,30 r1.6
  circle w0.254: c95,10 r1.6
  circle w0.254: c10,10 r1.6
  circle w0.254: c10,57 r1.6
  lines w0.254: 7,7 15,7 15,23 33,23 33,7 98,7 98,60 7,60 7,7 ; 18.5,26 23.5,26 23.5,28 18.5,28 18.5,26 ; 64.135,18.631 89.941,18.631 89.941,23.631 64.135,23.631 64.135,18.631

## Text inside footprints (layer, text, board x,y; h text height)
J1: Top Overlay "40" at 89.433,37.192 h0.89 r270; Top Overlay "1" at 89.927,56.117 h0.89 r270